# EAGLE board p2s (EAGLE 8.0.2)
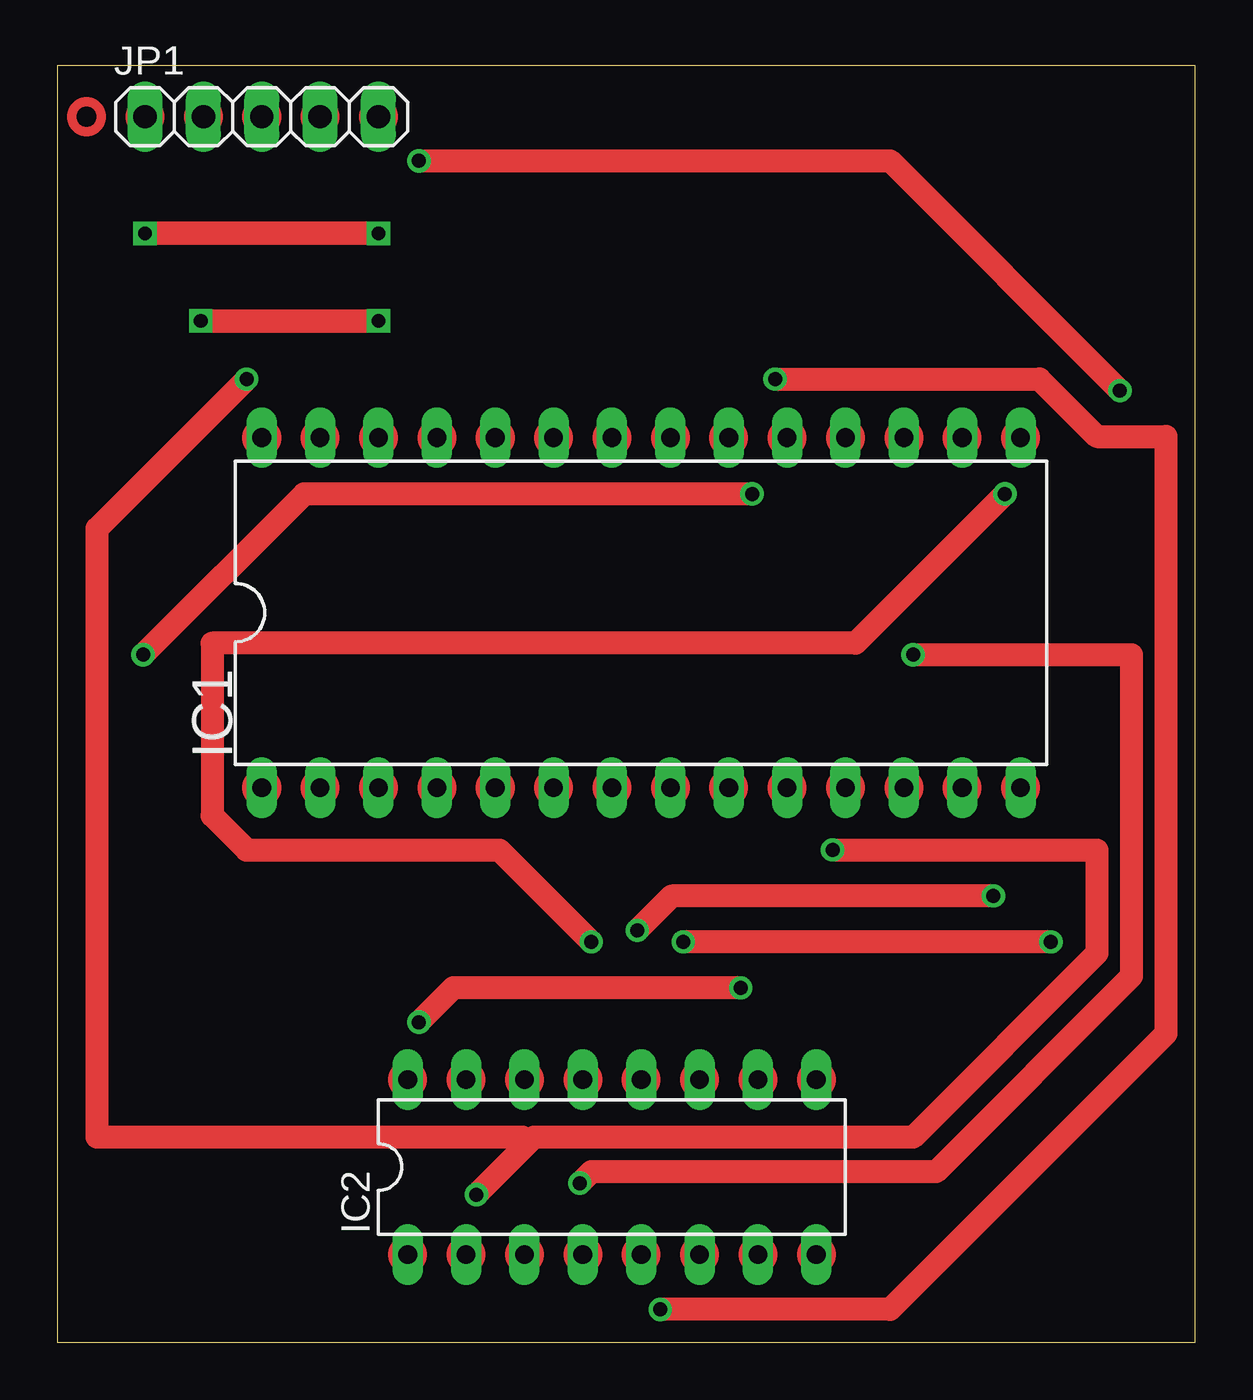
[diagram p0: board, top side]
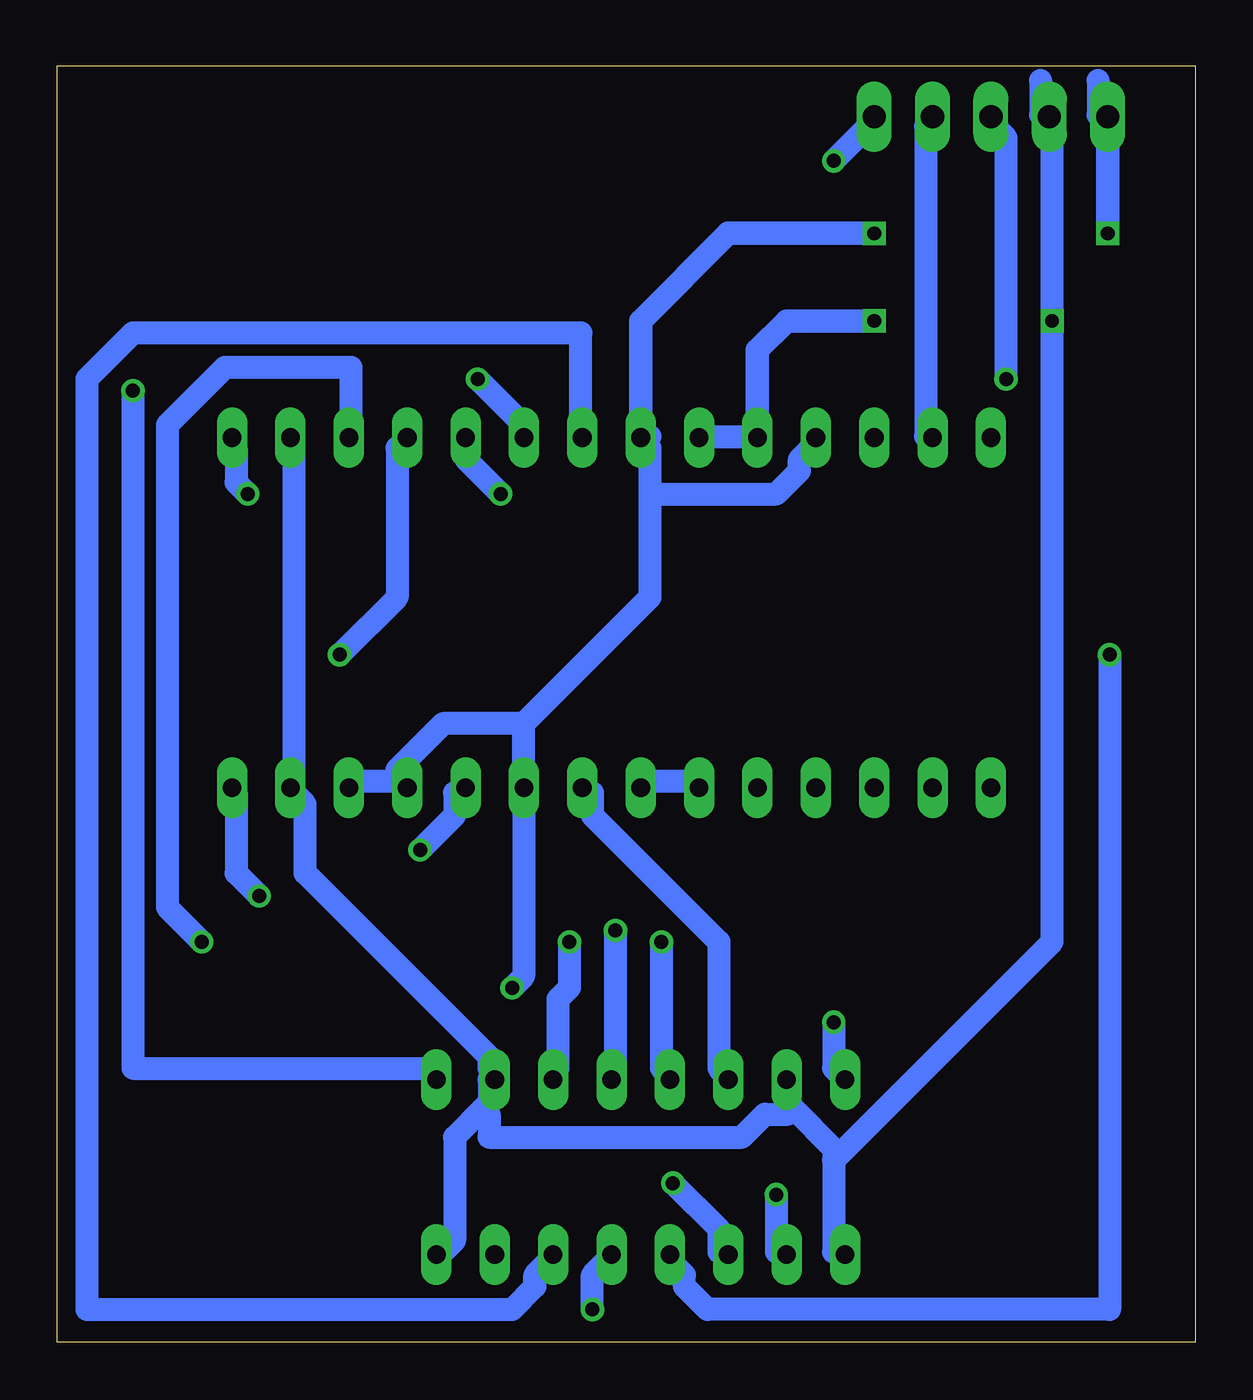
[diagram p1: board, bottom side, seen from below]

Size 49.51 x 55.55 mm. Coordinates in mm from the lower left corner, seen from the top.
Outline: 0,0 49.51,0 49.51,55.55 0,55.55 0,0
Copper layers (1*16): Top 0.035mm / dielectric 1.5mm / Bottom 0.035mm
Design rules "default *": minimum track width 1mm, minimum drill 24mil, track to track 0.5mm, track to pad 0.5mm, pad to pad 8mil, via to via 8mil, smd to smd 8mil, copper to edge 40mil, drill to drill 8mil, minimum pad ring 10mil, minimum via ring 8mil, stop-mask expansion 4mil, vias tented up to drill 0mil, thermal gap 10mil

## Footprints (pad centres in the part's own frame; a part is rotated, then mirrored left to right if it is on the bottom)
DIL28-6 = drill 0.813 long: 1 -16.51,-7.62; 2 -13.97,-7.62; 3 -11.43,-7.62; 4 -8.89,-7.62; 5 -6.35,-7.62; 6 -3.81,-7.62; 7 -1.27,-7.62; 8 1.27,-7.62; 9 3.81,-7.62; 10 6.35,-7.62; 11 8.89,-7.62; 12 11.43,-7.62; 13 13.97,-7.62; 14 16.51,-7.62; 15 16.51,7.62; 16 13.97,7.62; 17 11.43,7.62; 18 8.89,7.62; 19 6.35,7.62; 20 3.81,7.62; 21 1.27,7.62; 22 -1.27,7.62; 23 -3.81,7.62; 24 -6.35,7.62; 25 -8.89,7.62; 26 -11.43,7.62; 27 -13.97,7.62; 28 -16.51,7.62
DIL16 = drill 0.813 long: 1 -8.89,-3.81; 2 -6.35,-3.81; 3 -3.81,-3.81; 4 -1.27,-3.81; 5 1.27,-3.81; 6 3.81,-3.81; 7 6.35,-3.81; 8 8.89,-3.81; 9 8.89,3.81; 10 6.35,3.81; 11 3.81,3.81; 12 1.27,3.81; 13 -1.27,3.81; 14 -3.81,3.81; 15 -6.35,3.81; 16 -8.89,3.81
1X05 = drill 1.016 long: 1 -5.08,0; 2 -2.54,0; 3 0,0; 4 2.54,0; 5 5.08,0

## Placement (x,y rotation side)
IC1  ADC0808N  [DIL28-6]  25.4,31.75 0 top
IC2  74LS165N  [DIL16]  24.13,7.62 0 top
JP1  [1X05]  8.89,53.34 0 top

## Library data of the parts
IC1 = linear
IC2 = 74xx-eu
JP1 = pinhead

## Nets
CLK: IC1.10 IC2.2 JP1.3
GND: IC1.13 IC1.16 IC1.23 IC1.24 IC2.1 IC2.8 IC2.10 IC2.15 JP1.2
N$2: IC2.9 JP1.5
N$5: IC1.27 JP1.4
N$6: IC1.6 IC1.7
N$7: IC1.17 IC2.11
N$8: IC1.14 IC2.12
N$9: IC1.15 IC2.13
N$10: IC1.8 IC2.14
N$11: IC1.18 IC2.3
N$12: IC1.19 IC2.4
N$13: IC1.20 IC2.5
N$14: IC1.21 IC2.6
VCC: IC1.9 IC1.11 IC1.12 IC1.22 IC1.25 IC2.16 JP1.1

## Tracks (layer width: path | path; a pad name or v marks a point on that pad's centre or on a via)
CLK  (via drill 0.61)
  Top 1: 20.48,8.67 20.73,8.92 37.23,8.92 45.23,16.92 45.23,21.42 v33.73,21.42 | 20.48,8.67 v18.23,6.42 | v8.23,41.92 1.73,35.42 1.73,8.92 20.23,8.92 20.48,8.67
  Bottom 1: v18.23,6.42 18.23,3.92 IC2.2 | v33.73,21.42 32.23,22.92 32.23,23.92 IC1.10 | v8.23,41.92 8.23,52.42 8.73,52.92 JP1.3
GND  (via drill 0.6)
  Top 1.016: v13.97,44.45 v6.23,44.45
  Bottom 1: IC1.23 21.23,39.42 19.23,39.42 IC1.24 19.23,39.92 | 6.73,54.92 6.73,53.42 JP1.2 6.23,52.92 v6.23,44.45 6.23,17.42 15.73,7.92 | IC1.16 39.23,38.92 39.23,24.42 IC1.13 39.23,23.92 38.73,23.42 38.73,20.42 30.73,12.42 30.73,11.92 IC2.10 30.73,11.42 30.73,10.42 30.98,10.17 | 15.73,7.92 15.73,8.42 17.48,10.17 | 15.73,7.92 15.73,3.92 IC2.1 | 17.48,10.17 17.73,10.42 17.73,11.42 IC2.15 | 30.98,10.17 32.23,8.92 32.23,4.42 32.73,3.92 IC2.8 | 17.48,10.17 17.73,9.92 18.73,9.92 19.73,8.92 30.73,8.92 30.73,9.92 30.98,10.17
  Bottom 1.016: IC1.24 19.05,43.18 17.78,44.45 v13.97,44.45
N$2  (via drill 0.61)
  Top 1: v46.23,41.42 36.23,51.42 v15.73,51.42
  Bottom 1: v46.23,41.42 46.23,11.92 33.23,11.92 IC2.9 | v15.73,51.42 14.23,52.92 JP1.5
N$5
  Bottom 1: IC1.27 11.73,39.42 11.73,52.92 JP1.4
N$6
  Bottom 1: IC1.6 21.73,24.42 23.73,24.42 IC1.7
N$7  (via drill 0.61)
  Top 1: v43.23,17.42 v27.23,17.42
  Bottom 1: v27.23,17.42 27.23,15.42 27.73,14.92 27.73,11.92 IC2.11 | v43.23,17.42 44.73,18.92 44.73,39.92 42.23,42.42 36.73,42.42 36.73,39.42 IC1.17
N$8  (via drill 0.61)
  Top 1: v25.23,17.92 26.73,19.42 v40.73,19.42
  Bottom 1: v25.23,17.92 25.23,11.92 IC2.12 | v40.73,19.42 41.73,20.42 41.73,23.92 IC1.14
N$9  (via drill 0.61)
  Top 1: v23.23,17.42 19.23,21.42 8.23,21.42 6.73,22.92 6.73,30.42 34.73,30.42 v41.23,36.92
  Bottom 1: v23.23,17.42 23.23,11.92 IC2.13 | v41.23,36.92 41.73,37.42 41.73,38.92 IC1.15
N$10
  Bottom 1: IC2.14 20.73,11.92 20.73,17.42 26.23,22.92 26.23,23.92 IC1.8
N$11  (via drill 0.61)
  Top 1: v22.73,6.92 23.23,7.42 38.23,7.42 46.73,15.92 46.73,29.92 v37.23,29.92
  Bottom 1: v22.73,6.92 20.73,4.92 20.73,3.92 IC2.3 | v37.23,29.92 34.73,32.42 34.73,38.92 IC1.18
N$12  (via drill 0.61)
  Top 1: v3.73,29.92 10.73,36.92 v30.23,36.92
  Bottom 1: v3.73,29.92 3.73,1.42 21.23,1.42 22.23,2.42 22.23,2.92 22.73,3.42 IC2.4 | v30.23,36.92 31.73,38.42 31.73,38.92 IC1.19
N$13  (via drill 0.61)
  Top 1: v26.23,1.42 36.23,1.42 48.23,13.42 48.23,39.42 45.23,39.42 42.73,41.92 v31.23,41.92
  Bottom 1: v26.23,1.42 26.23,2.92 25.73,3.42 IC2.5 | v31.23,41.92 29.23,39.92 29.23,39.42 IC1.20
N$14
  Bottom 1: IC2.6 28.23,3.42 28.73,2.92 28.73,2.42 29.73,1.42 48.23,1.42 48.23,41.92 46.23,43.92 26.73,43.92 26.73,39.42 IC1.21
VCC  (via drill 0.6, 0.61)
  Top 1: v15.73,13.92 17.23,15.42 v29.73,15.42
  Top 1.016: v13.97,48.26 v3.81,48.26
  Bottom 1: IC1.12 36.73,24.42 34.73,24.42 IC1.11 34.73,24.92 32.73,26.92 29.23,26.92 | v15.73,13.92 15.73,11.92 IC2.16 | v29.73,15.42 29.23,15.92 29.23,23.92 IC1.9 29.23,24.42 29.23,26.92 | 23.73,36.92 18.23,36.92 17.23,37.92 17.23,38.42 16.73,38.92 IC1.25 | 23.73,36.92 23.73,38.92 IC1.22 23.73,39.42 | 4.23,54.92 4.23,53.42 JP1.1 | 29.23,26.92 23.73,32.42 23.73,36.92
  Bottom 1.016: IC1.22 24.13,44.45 20.32,48.26 v13.97,48.26 | v3.81,48.26 JP1.1
(copper drawn outside any net)
  shapes: Top circle x76